# Altium PCB TH255A_MG32F003_TSSOP20_QFN20_EV_V10.PcbDoc (part 2 of 2)
Units mil, origin at the board's own origin, x right, y up, seen from the top; angles counter-clockwise.
Board outline 4094.49 x 2637.8 mil, 2 copper layers (Top Layer, Bottom Layer); 121 components, 89 nets, 513 pads, 230 vias.
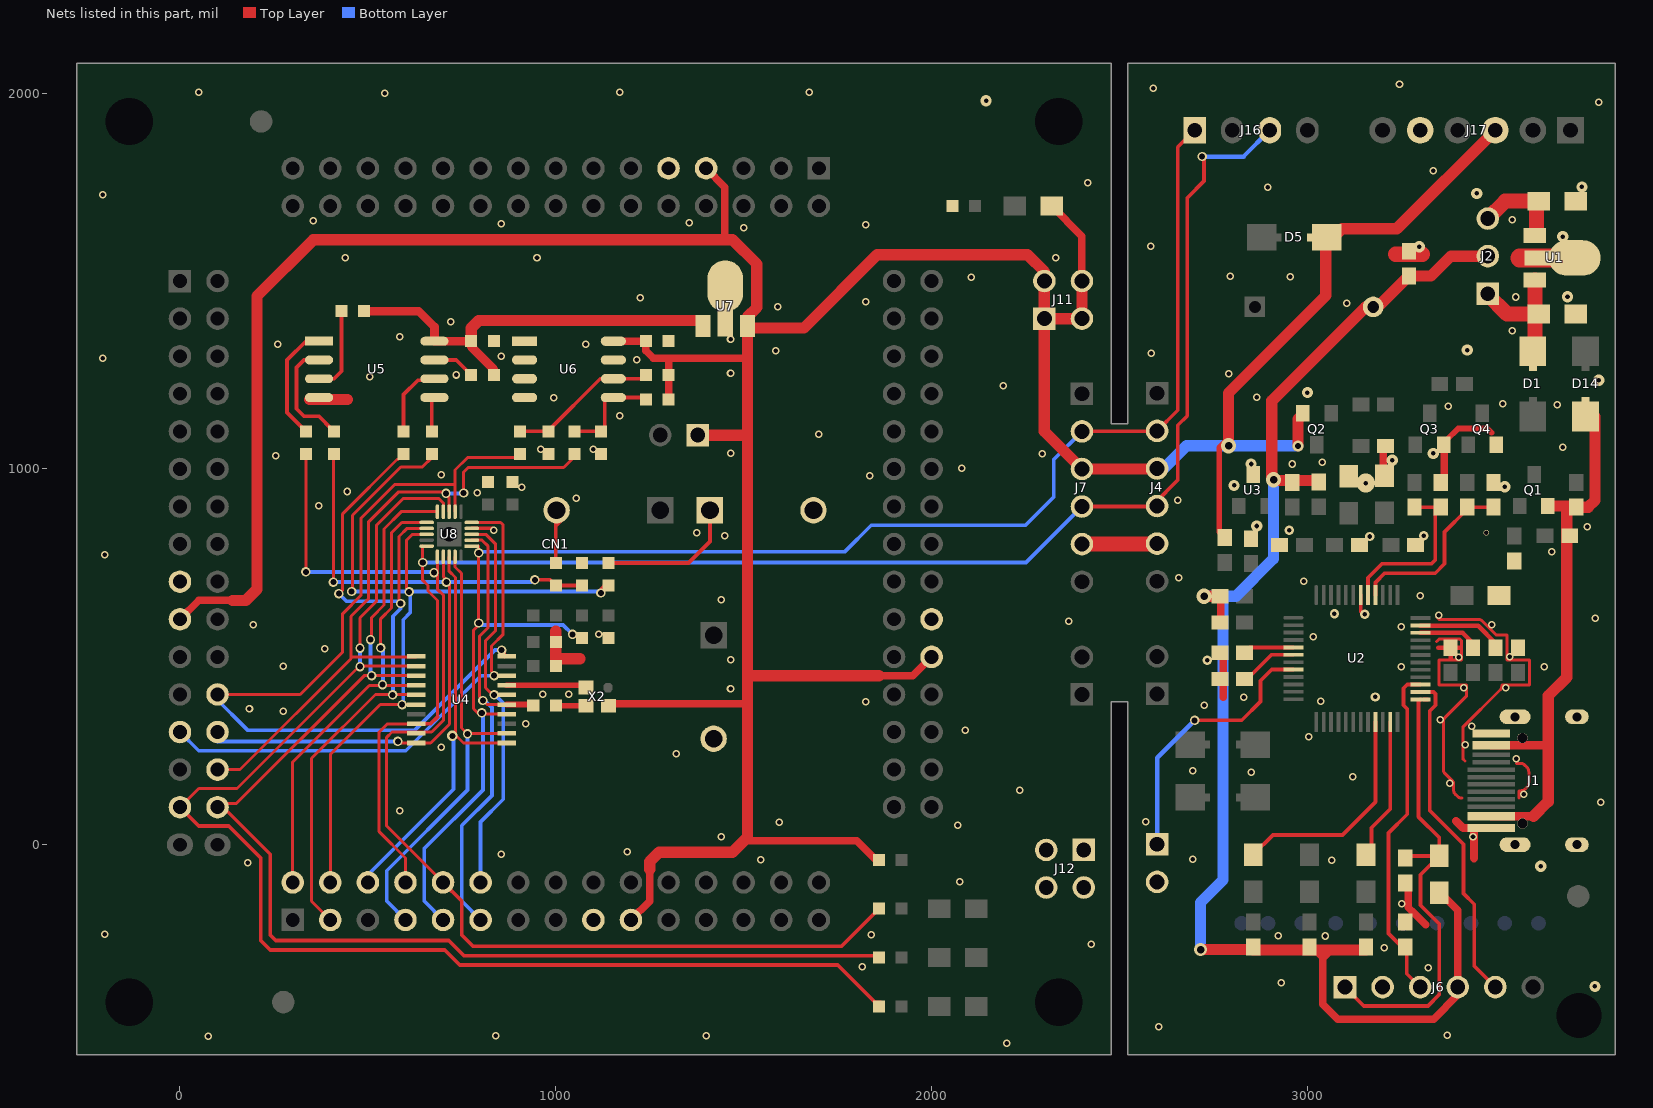
[diagram p2: the nets of this part, all layers, seen from the top]

## Via types
v1: diameter 20, hole 12, Top Layer to Bottom Layer, tented top, 135 vias
v2: diameter 25, hole 16, Top Layer to Bottom Layer, tented top, 45 vias
v3: diameter 30, hole 12, Top Layer to Bottom Layer, tented top, 17 vias
v4: diameter 20, hole 12, Top Layer to Bottom Layer, tented both sides, 15 vias
v5: diameter 25, hole 12, Top Layer to Bottom Layer, tented top, 7 vias
v6: diameter 30, hole 16, Top Layer to Bottom Layer, tented top, 3 vias
v7: diameter 40, hole 20, Top Layer to Bottom Layer, tented top, 3 vias
v8: diameter 28, hole 16, Top Layer to Bottom Layer, tented top, 1 vias
v9: diameter 15, hole 12, Top Layer to Bottom Layer, tented top, 1 vias
v10: diameter 35, hole 20, Top Layer to Bottom Layer, tented top, 1 vias
v11: diameter 50, hole 12, Top Layer to Bottom Layer, tented top, 1 vias
v12: diameter 25, hole 16, Top Layer to Bottom Layer, tented both sides, 1 vias

## Nets (pads, with @x,y where several pads share a name; then routed paths per layer and width w, separated by ;. In a path a pad name is that pad's centre, name@x,y a point inside that pad or via, vN(x,y) a via of type N, cw(c..) or ccw(c..) an arc to the next point about the centre after c; other vN are vias at no path point) (continued)
NetR15_1: R15.1 U2.35 | length 263.6
  Top Layer w12: U2.35@3300.46,582.73 3330,582.73 ; 3362.26,582.73 3330,582.73 ; R15.1@3500.55,524.26 3500.55,536.26 3454.08,582.73 3330,582.73
NetR16_1: R16.1 U2.34 | length 163.6
  Top Layer w12: U2.34@3300.46,564.05 3412.76,564.05 3440.55,536.26 R16.1@3440.55,524.26
NetR59_1: R59.1 U5.7 | length 114.5
  Top Layer w10: U5.7@677.09,1290 735,1290 R59.1@775,1250
NetR60_2: R60.2 U5.3 | length 218.2
  Top Layer w10: U5.3@370,1240 409.87,1240 430,1260.13 R60.2@430,1410
NetR70_1: R70.1 SW4.2 | length 169.2
  Top Layer w10: R70.1@1000,750 1000,847.79 ; SW4.2@1000,887.79 1000,847.79 ; SW4.2@1022.2,870 1000,847.79
NetR72_2: R72.2 SW3.1 | length 376.6
  Top Layer w10: R72.2@1140,750 1353,750 1410,807 SW3.1@1410,890
P44: J6.5 U2.26 | length 900.8
  Top Layer w10: U2.26@3300.46,406.57 3335.24,406.57 3340.55,401.26 3340.55,371.26 3325.55,356.26 3325.55,91.26 3415.55,1.26 3415.55,-129.74 3444.1,-158.29 3444.1,-322.84 J6.5@3500,-378.74
P45: J6.3 R25.1 U2.27 | length 924.9
  Top Layer w10: R25.1@3264.28,-268.02 3264.28,-271.74 3264.28,-343.02 J6.3@3300,-378.74 ; R25.1@3265.55,-266.74 3260.55,-266.74 3245.99,-266.74 3215.55,-236.3 3215.55,31.26 3265.55,81.26 3265.55,361.26 3255.55,371.26 3255.55,416.26 3265.54,426.25 U2.27@3300.46,426.25 ; J6.3@3301.28,-377.46 J6.3@3308.55,-384.74
PA0: CN1.114 R61.1 U4.10 U8.7 | length 2264.6
  Top Layer w8: CN1.114@100,400 320,400 433,513 433,615 482.31,664.31 482.31,869.77 570.57,958.03 732.12,958.03 ; U8.7@732.12,886.22 732.12,958.03 ; U4.10@860.89,500.49 U4.10@863,500.49 ; U4.10@863,500.2 U4.10@863,500.49 ; v2@863,517 863,501.2 U4.10@863,500.49 ; U4.10@869,501.2 868.29,500.49 U4.10@863,500.49 ; R61.1@905,1030 765,1030 732.12,997.12 732.12,958.03
  Bottom Layer w10: CN1.114@85,400 92.5,392.5 180,305 625,305 838,518 v2(856,518)
PA0_I2C1_SCL: C46.1 R61.2 R68.2 U6.6 | length 381.4
  Top Layer w10: R61.2@905,1100 978.37,1100 979.18,1100.82 1118.37,1240 U6.6@1153.11,1240 R68.2@1228.37,1240
PA1: CN1.115 U4.8 U8.5 | length 1428.8
  Top Layer w8: U8.5@776.37,857.72 853.35,857.72 860,851.06 860,560 829,529 829,461
  Bottom Layer w10: CN1.115@0,300 50,250 601,250 801,450 v2(836,450)
PA2: CN1.116 R63.1 R70.2 R71.1 U4.20 U8.17 | length 2073.4
  Top Layer w8: v2@409,703 R63.1@409,1040 ; v2@589.2,270.8 U4.20@628.84,270.8 667,270.8 717,320.8 v2@717,697 ; U8.17@700.63,766.22 700.63,713.37 v2@712,702
  Top Layer w10: v2(944.41,705) 985,705 R70.2@1000,690 R71.1@1070,690
  Bottom Layer w10: CN1.116@100,275 v2(580,275) v2@585,275 ; v2(408,699) v2(709,699) v2@934,699
PA2_SPI_MISO: R63.2 U5.2 | length 296
  Top Layer w10: U5.2@370,1290 330,1290 310,1270 310,1160 330,1140 369.9,1140 R63.2@404.9,1105
PA4: CN1.118 R62.1 U4.11 U8.8 | length 1739.4
  Top Layer w8: CN1.118@100,200 160,200 455,495 455,499 ; U4.11@628.84,501.2 626.64,499 455,499 ; U8.8@716.37,886.22 716.37,923.63 706.5,933.5 701.97,938.03 580.57,938.03 502.31,859.77 502.31,655.31 455,608 455,499 ; v2(755,936) 755,992 767,1004 1021,1004 R62.1@1049.5,1032.5
  Bottom Layer w10: v2(708,935) v2@754,935
PA4_I2C1_SDA: C45.1 R57.2 R62.2 U6.5 | length 245.9
  Top Layer w10: R62.2@1050,1100 C45.1@1120,1100 ; C45.1@1130,1100 1130,1190 U6.5@1130,1194 ; U6.5@1153.11,1190 R57.2@1235,1190
PA5: CN1.119 R56.1 U4.12 U8.9 | length 3625.2
  Top Layer w8: CN1.119@0,100 50,150 152,150 473.5,471.5 473.5,474 473.5,476.5 v2@474,477 ; v2@474,475.6 479,475.6 U4.12@628.84,475.6 ; v2@474,523 476.5,525.5 479,528 479,604 522.93,647.93 522.93,850.4 593.48,920.94 689.06,920.94 700.63,909.37 U8.9@700.63,886.22
  Top Layer w10: CN1.119@0,100 50,50 130,50 215,-35 215,-255 240,-280 704.64,-280 744.64,-320 1750,-320 1848.74,-418.74 1860,-418.74 R56.1@1864.96,-418.74
  Bottom Layer w10: v2@479,477 v2(479,523)
  other v2: 479,474
PA6: CN1.120 R55.1 U4.13 U8.10 | length 3259.2
  Top Layer w8: CN1.120@100,100 115,100 125,110 150,110 490,450 v2(510,450) U4.13@628.84,450 ; v2@510,546 510,605 542.93,637.93 542.93,840.4 588.76,886.22 U8.10@684.88,886.22
  Top Layer w10: CN1.120@115,100 240,-25 240,-240 255,-255 715,-255 755,-295 1843.7,-295
  Bottom Layer w10: v2@507,450 v2(507,546) ; v2@508.5,547.5 v2@510,546
PA7: CN1.2 U4.14 U8.11 | length 1287.9
  Top Layer w8: CN1.2@300,-100 300,-50 ; 300,-20 300,-50 ; v2(534,524) 534,601.07 562.93,630 562.93,830.4 590.25,857.72 U8.11@656.37,857.72 ; U4.14@628.84,424.4 539,424.4 538.91,424.4 538.16,425.16 536.16,427.16 533,424 504,424 300,220 300,-50
  Bottom Layer w10: v2@540,425 540,426 v2@540,524
  other v2: 539,426
PA8: CN1.3 R65.1 U4.15 U8.12 | length 1975.2
  Top Layer w8: CN1.3@400,-200 350,-150 350,230 520,400 ; v2(423,668) 433,678 433,880.46 577.54,1025 580,1025 R65.1@595,1040 ; v2@582.93,647 582.93,820.4 604.51,841.97 U8.12@656.37,841.97 ; U4.15@630,400 628.84,400 v2@566,400 ; 520,400 v2@566,400 ; 520,400 v2@566,400
  Bottom Layer w10: v2(423,668) 443,648 v2@587,648 ; v2@567,400 567,608 587,628 v2(587,642) v2@587,647
  other v2: 566,399
PA8_SPI_SCK: R65.2 U5.6 | length 217.2
  Top Layer w10: R65.2@595,1100 595,1197.78 633.48,1236.26 677.09,1236.26 U5.6@698.5,1236.26
PA9: CN1.4 R64.1 R72.1 U4.16 U8.13 | length 2287.5
  Top Layer w8: CN1.4@400,-100 400,240 533.2,373.2 591,373.2 U4.16@628.84,373.2 ; v2@459.31,674 459.31,876.77 587.54,1005 645,1005 670,1030 R64.1@670,1040 ; v2@602.31,681.69 602.31,809.77 618.76,826.22 U8.13@656.37,826.22
  Top Layer w10: v2(1120,670) 1120,680 R72.1@1135,695
  Bottom Layer w10: v2@459.31,674 610,674 v2@1120,674 ; v2@594,382.2 594,599 613,618 v2@613,670
  other v2: 591,373 610,673 457,674
PA9_SPI_MOSI: R64.2 U5.5 | length 90
  Top Layer w10: R64.2@670,1100 U5.5@670,1190
PA11: CN1.6 U4.1 U8.18 | length 1107.6
  Top Layer w8: U8.18@716.37,766.22 716.37,727.63 733,711 733,292 754.2,270.8 U4.1@869,270.8
  Bottom Layer w10: CN1.6@500,-100 500,-80 727.5,147.5 v8@727.5,287.5
  other v8: 725,290
PA12: CN1.7 U4.2 U8.19 | length 1193
  Top Layer w8: U8.19@732.12,766.22 732.12,739 749,722.12 749,311 763.6,296.4 765,296.4 U4.2@869,296.4
  Bottom Layer w10: CN1.7@600,-200 550,-150 550,-69.08 765,145.92 v2(765,295)
PA13_SWDIO: CN1.8 J4.4 J7.4 J16.3 U4.18 U8.15 | length 4460.5
  Top Layer w8: CN1.8@600,-100 600,-35 530,35 530,300 552,322 U4.18@628.84,322 ; U8.15@645,795 645,794.72 645,751 645,705 660,690 660,675 685,650 685,340
  Top Layer w10: U4.18@628.84,322 667,322 685,340 ; J7.4@2400,900 J4.4@2585,900 ; J4.4@2593,908.26 2655,970.26 2655,1116.26 2680,1141.26 2680,1721.26 2725,1766.26 v12@2725,1831.26
  Bottom Layer w10: v2@645,751 v2(646,751) 1405,751 ; 1605,751 1405,751 ; J7.4@2400,900 2251,751 1405,751
  Bottom Layer w12: v12(2720,1831.26) 2830,1831.26 J16.3@2900,1901.26
PA14_SWCLK: CN1.9 J4.2 J7.2 J16.1 R69.1 U4.4 U8.1 | length 4290.9
  Top Layer w8: U8.1@795,795 795,794.72 v2(795,777) v2(795,590) 795,585 781,571 781,362 v2@795.4,347.6 ; v2@803,347.6 U4.4@869,347.6
  Top Layer w10: v2@1040,555 R69.1@1070,555 ; J7.2@2400,1100 J4.2@2600,1100 ; J4.2@2600,1101.26 2655,1156.26 2655,1856.26 J16.1@2700,1901.26
  Bottom Layer w10: CN1.9@700,-200 650,-150 650,-10 806,146 v2@806,351 ; v2@795,585 1019.41,585 v2(1044.41,560) ; v2@795,775 800,780 1769.64,780 1839.64,850 2250,850 2325,925 2325,1025 J7.2@2400,1100
  other v2: 803,351
PA15: CN1.10 R54.1 R66.1 U4.19 U8.16 | length 3029.1
  Top Layer w8: v2@335,736 R66.1@335,1040 ; U8.16@684.88,766.22 684.88,724 684.88,680.12 701,664 701,331.2 669.8,300 628.84,300 564,300 550,286 550,50 CN1.10@700,-100
  Top Layer w10: CN1.10@700,-100 750,-150 750,-240 780,-270 1760,-270 R54.1@1860,-170
  Bottom Layer w10: v2(335,726) v2@676,726
  other v2: 676,724
PA15_SPI_NSS: R66.2 U5.1 | length 316.4
  Top Layer w10: R66.2@335,1100 285,1150 285,1290 335,1340 U5.1@370,1340
PASS: D3.2 U2.23 | length 376.3
  Top Layer w10: D3.2@3170.55,-28.74 3170.55,-26.27 3170.55,45.42 3220.3,95.18 U2.23@3220.3,326.91
PB0: CN1.11 R67.1 U4.5 U8.2 | length 1262.9
  Top Layer w8: U8.2@776.37,810.47 803.53,810.47 820,794 820,578 797,555 797,393 v2(806,384) 816.8,373.2 U4.5@869,373.2
  Top Layer w15: U4.5@869,373.2 R67.1@940,373.2
  Bottom Layer w10: CN1.11@800,-200 750,-150 750,50.92 830,130.92 830,365 811,384 v2(806,384)
PB0_OSCIN: R67.2 X2.3 | length 80
  Top Layer w15: R67.2@1000,370 X2.3@1080,370
PB1: CN1.12 U4.6 U8.3 | length 1065.9
  Top Layer w8: U8.3@776.37,826.22 813.78,826.22 840,800 840,570 813,543 813,418 832.2,398.8 v2(836,398.8) U4.6@869,398.8
  Bottom Layer w10: CN1.12@800,-100 800,61 860,121 860,377 v2@837.1,399.9
RST: C12.2 J6.1 R22.2 U2.25 | length 1228.1
  Top Layer w10: J6.1@3100,-378.74 3150,-428.74 3320.55,-428.74 3350.55,-398.74 3350.55,-210.74 3300.55,-160.74 3300.55,-79.53 C12.2@3350.55,-29.53 ; R22.2@3266.76,-29.53 C12.2@3350.55,-29.53 ; U2.25@3300.55,386.26 3295.55,381.26 3295.55,74.26 3350.55,19.26 C12.2@3350.55,-29.53 ; U2.25@3310,386.88 U2.25@3319.38,386.88
RST_CTRL_51: R19.1 R20.1 U2.41 | length 455
  Top Layer w10: U2.41@3161.25,664.39 3161.25,710.38 3198.38,747.52 3329.96,747.52 3340,757.56 R20.1@3340,898.26 ; R19.1@3285,898.26 R20.1@3340,898.26 ; R20.1@3355,898.26 R20.1@3340,898.26
RST_CTRL_ARM: R23.1 R24.1 U2.40 | length 474.6
  Top Layer w10: U2.40@3180.93,664.39 3180.93,698.19 3205.26,722.52 3339.96,722.52 3365,747.56 3365,832.56 R23.1@3422.46,890.02 ; R23.1@3425,898.26 R24.1@3495,898.26
TOOL_OPTION0: R2.1 U2.5 | length 135.2
  Top Layer w10: R2.1@2833,511.26 2846.92,525.18 U2.5@2962.48,525.18
TOOL_OPTION1: R3.1 U2.6 | length 156.1
  Top Layer w10: R3.1@2833,441.26 2840,441.26 2904.23,505.49 U2.6@2962.48,505.49
USBOK: D2.2 U2.21 | length 596.3
  Top Layer w10: D2.2@2855.55,-26.27 2908.08,26.26 3093,26.26 3180.93,114.2 U2.21@3180.93,326.91
VCC3: C47.1 R59.2 R60.1 U5.8 U7.1 | length 1115.4
  Top Layer w23: R60.1@490,1420 635,1420 677.09,1377.91 U5.8@677.09,1340 C47.1@775,1340 775,1325 835,1265 R59.2@835,1250
  Top Layer w30: C47.1@775,1340 775,1375 795,1395 U7.1@1391.89,1395
VCC_USB: C2.1 D14.1 J1.A4 J1.A9 J1.M5 J1.M6 Q1.2 R1.1 | length 1456.2
  Top Layer w22: J1.A4@3488.8,75.87 3572.2,75.87 3601.63,75.87 ; J1.A9@3488.8,264.88 3572.2,264.88 3640.55,264.88
  Top Layer w30: 3601.63,75.87 3640.55,114.8 3640.55,264.88 3640.55,396.26 3689.88,445.59 3689.88,822.52 3689.88,888.14 ; Q1.2@3640,901.26 3692,901.26 ; R1.1@3705,898.26 R1.1@3715,898.26 3746.96,898.26 3764.96,916.26 D14.1@3764.96,1139.65
VCP_OPTION: J3.1 U2.8 | length 722
  Top Layer w10: v2(2699.96,331.26) 2825,331.26 2875,381.26 2875,436.26 2904.86,466.12 U2.8@2962.48,466.12
  Bottom Layer w12: J3.1@2600,1.26 2600,231.3 v2(2699.96,331.26)
VDD: C12.1 J2.2 J6.4 R4.1 R6.1 R9.1 R10.1 R11.1 R12.1 R13.1 R14.2 SW1.2 | length 3958.9
  Top Layer w12: R11.1@3014.74,-279.22 3015.26,-279.74 3040.55,-305.03 3040.9,-305.38 ; 3040.91,-307.09 3067.07,-280.93
  Top Layer w20: v7@2728.07,656.26 R13.1@2762,656.26 ; v7@2733.07,666.26 R13.1@2767,666.26 ; R12.1@2769,591.26 R13.1@2769,660.82 ; 3040.55,-279.74 3040.55,-305.03 3040.55,-423.74 3080.55,-463.74 3335.55,-463.74 3400,-399.29 J6.4@3400,-378.74 3400,-174.19 3360.55,-134.74 C12.1@3360.55,-127.95
  Top Layer w30: v10(2715.55,-278.74) R6.1@2855.55,-278.74 ; R6.1@2855.55,-279.74 3005.55,-279.74 3015.26,-279.74 3040.55,-279.74 R9.1@3155.55,-279.74 ; R14.2@2964.96,969.26 2959.96,969.26 2911.96,969.26 v7(2909.96,971.26) 2904.96,976.26 2904.96,1181.26 3153.71,1430.01 3163.79,1430.01 3168.77,1425.03 3175,1418.8 3181.23,1425.03 3269.46,1513.26 R4.1@3270,1513.26 3328.96,1513.26 3381.96,1566.26 J2.2@3480,1566.26 ; R14.2@2969.96,969.26 R10.1@3029.96,969.26
  Bottom Layer w30: v10(2715.55,-278.74) 2715.55,-153.74 2775.55,-93.74 2775.55,661.26 ; v7(2725,661.26) 2775.55,661.26 ; 2775.55,661.36 2775.55,661.26 ; v7(2909.96,971.26) 2909.96,761.22 2810,661.26 2775.55,661.26
VDD3: C5.1 J2.3 U1.1 | length 231.2
  Top Layer w40: J2.3@3480,1666.26 3526.26,1712.52 C5.1@3609.96,1712.52 ; U1.1@3609.96,1636.26 C5.1@3609.96,1712.52 ; C5.1@3615.75,1712.52 C5.1@3609.96,1712.52
VDD5: C4.1 D1.2 J2.1 U1.3 | length 318.5
  Top Layer w40: J2.1@3478.52,1464.78 3530.79,1412.52 C4.1@3604.96,1412.52 ; D1.2@3604.96,1342.87 C4.1@3604.96,1412.52 ; U1.3@3604.96,1502.52 C4.1@3604.96,1412.52 ; C4.1@3615.75,1412.52 C4.1@3604.96,1412.52
VDUT: C44.1 CN1.19 CN1.39 CN1.67 CN1.109 D5.2 D13.1 J4.3 J7.3 J11.1 J11.2 J11.3 J11.4 J17.3 JP3.1 Q2.2 R7.1 R57.1 R58.2 R68.1 U6.8 U7.3 X2.4 | length 10608.6
  Top Layer w15: R7.1@2780,817.26 2765,832.26 2765,1056.76 2780,1071.76 2790,1081.76 ; v7@2797.75,1054.01 v7@2800,1056.26
  Top Layer w20: CN1.109@0,600 50,650 140,650 ; X2.4@1140,375 1510,375 ; U6.8@1153.11,1340 C44.1@1240,1340 1240,1315 1260,1295 1510,1295 ; CN1.19@1200,-200 1250,-150 1250,-65 ; R57.1@1300,1185 R68.1@1300,1250 1300,1295 ; CN1.67@1400,1800 1450,1750 1450,1610 ; 1511.26,11.26 1800.6,11.26 R58.2@1855.93,-44.07 ; 1860,450 1950,450 CN1.39@2000,500 ; D13.1@2319.21,1700 2400,1619.21 J11.4@2400,1500 ; D5.2@3018.11,1616.26 D5.2@3051.58,1616.26 D5.2@3069.09,1616.26
  Top Layer w30: 140,650 175,650 205,680 205,1460 355,1610 1450,1610 1470,1610 1535,1545 1535,1430 1510,1405 U7.3@1510,1390 ; 1250,-65 1250,-45 1275,-20 1470,-20 1510,20 1510,375 1510,450 ; 1410,1090 1510,1090 ; 1860,450 1510,450 ; J11.4@2400,1500 J11.3@2400,1400 J11.1@2300,1400 ; J4.3@2600,1000 J7.3@2400,1000 2300,1100 J11.1@2300,1400 ; v7(2790,1061.76) 2790,1081.76 2790,1202.17 3049.09,1461.26 D5.2@3049.09,1611.26 ; v6@2974.96,1061.76 2974.96,1132.2 Q2.2@2987.96,1145.2 ; D5.2@3064.09,1611.26 3069.09,1616.26 3091.85,1639.02 3237.76,1639.02 J17.3@3500,1901.26 ; 1510,450 1510,1090 ; 1510,1090 1510,1295 U7.3@1510,1380 U7.3@1510,1390 ; U7.3@1510,1390 1515,1385 1525,1375 1660,1375 1855,1570 2255,1570 2300,1525 J11.2@2300,1500 J11.1@2300,1400
  Bottom Layer w30: J4.3@2618.03,1001.76 2678.03,1061.76 v7(2790,1061.76) v6@2974.96,1061.76
  other v6: 2974.96,1061.26
VSS: C1.2 C3.2 C4.2 C5.2 C6.2 C7.1 C8.1 C9.2 C10.2 C11.2 C13.2 C14.2 C15.2 C16.2 C18.1 C44.2 C45.2 C46.2 C47.2 CN1.17 CN1.41 CN1.69 CN1.107 J1.A1 J1.A12 J1.M1 J1.M2 J1.M3 J1.M4 J3.2 J4.5 J6.2 J7.5 J12.1 J12.2 J12.3 J12.4 J17.5 Q3.3 Q4.3 R2.2 R3.2 R4.2 R5.1 R8.2 R20.2 R21.2 R22.1 R24.2 R25.2 R43.1 R71.2 SW2.2 SW3.2 U1.2 U2.42 U3.3 U4.7 U5.4 U6.1 U6.2 U6.3 U6.4 U6.7 U7.2 U8.4 X2.2 | length 3566.8
  Top Layer w8: 3344.04,541.05 3350.04,547.05 3380.55,547.05 3405.72,547.05 3410.55,542.22 3410.55,499.26 3410.55,491.76 3402.55,491.76 3350.55,491.76 3350.55,424.76 3415.55,424.76 3423.55,424.76 3423.55,418.26 3423.55,396.3 3366.53,339.28 ; v1@3344.55,605.26 3350.08,599.73 3454.08,599.73 ; 3366.53,188.78 cw(c3378.55,200.8) 3361.55,200.8 ; 3366.55,339.26 ccw(c3378.57,327.24) 3361.57,327.24 3361.55,200.8 ; 3399.17,128.83 ccw(c3411.19,140.85) 3411.19,123.85 cw(c3411.19,140.85) 3399.15,128.85 3393.55,134.45 ; 3419.55,222.9 3413.55,228.9 3413.55,266.26 3413.55,312.76 3512.55,411.76 ccw(c3500.55,423.8) 3517.55,423.8 cw(c3500.55,423.8) 3512.57,411.78 ; 3517.55,424.76 3527.55,424.76 3590.55,424.76 3590.55,491.76 3538.55,491.76 3530.55,491.76 3530.55,500.26 3530.55,557.76 3503.09,557.76 3483.07,577.78 3466.12,594.73 ; 3556.09,216.9 3566.41,216.9 ; 3562.8,123.94 3562.8,134.26 3562.8,143.53 3567.33,143.53 ; 3579.35,148.51 cw(c3567.33,160.53) 3567.33,143.53 ; 3584.08,153.24 ccw(c3572.06,165.26) 3589.06,165.26 ; 3584.08,206.28 cw(c3572.06,194.26) 3589.06,194.26 ; 3361.55,200.8 ccw(c3378.55,200.8) 3366.55,188.76 3385.3,170.01 3388.55,166.76 3388.55,163.26 3388.55,146.49 ; 3388.55,146.49 ccw(c3405.55,146.49) 3393.55,134.45 ; 3388.55,146.49 ccw(c3405.55,146.49) 3393.53,134.47 ; 3454.08,599.73 cw(c3454.08,582.73) 3466.12,594.73 ; 3454.08,599.73 cw(c3454.08,582.73) 3466.1,594.75 ; 3566.41,216.9 cw(c3566.41,199.9) 3578.43,211.92 ; 3566.41,216.9 cw(c3566.41,199.9) 3578.45,211.9 ; 3567.33,143.53 ccw(c3567.33,160.53) 3579.37,148.53 3584.06,153.22 ccw(c3572.06,165.26) 3589.06,165.26 ; 3578.45,211.9 3584.06,206.3 cw(c3572.06,194.26) 3589.06,194.26 ; 3589.06,165.26 3589.06,194.26
  Top Layer w10: U8.4@776.37,841.97 830.03,841.97 v1(835,837) ; 3141.56,620.27 U2.42@3141.56,664.39
  Top Layer w12: 3348.55,524.26 C1.2@3380.55,524.26 C1.2@3381.55,524.26 ; 3381.55,495.26 C1.2@3381.55,524.26 ; C1.2@3381.55,532.26 C1.2@3381.55,524.26 ; 3408.55,524.26 C1.2@3381.55,524.26
  Top Layer w15: 940,424.4 U4.7@869,424.4 X2.2@1075,424.4 ; Q3.3@3370.25,1076.55 3401.2,1107.5 3478.66,1107.5 3489.9,1096.26
  Top Layer w20: 2776,393.16 2776,441.26 R2.2@2776,508.79 ; C9.2@3202,969.26 3202,981.73 3202,1023.26 3202,1061.26 R21.2@3202,1066.79 ; R22.1@3268.55,-97.74 3268.55,-101.74 3268.55,-156.84 3268.55,-166.85 3283.99,-182.3 3315.04,-213.34 ; R20.2@3364,956.26 3364,964.26 Q3.3@3364,1053.79
  Top Layer w22: 3395.55,63.16 3414.34,44.38 J1.A1@3488.8,44.38 J1.A1@3540.55,44.38 ; 3443.44,-35.95 3443.44,21.26 J1.A1@3443.44,38.51
  Top Layer w30: U5.4@344.9,1185 370,1185 444.9,1185 ; 1000,495 1064.4,495 ; 1000,503.6 C14.2@1000,540 1000,568
  Top Layer w40: J7.5@2400,800 J4.5@2600,800 ; 3234.9,1571.26 3270,1571.26 3297.56,1571.26 3306,1571.26
  Top Layer w50: 3564.96,1561.57 U1.2@3628.58,1561.57 U1.2@3704.96,1561.57
  other v1: 2200,-528.1 74.9,-510 840,-508.1 1400,-508.1 3372.55,-506.84 2604.9,-483.74 2930.55,-366.84 3321.55,-326.84 1814.9,-325 3204.9,-273.74 2424.9,-265 3047.55,-242.74 2922.55,-241.74 1840,-240 -200,-238.1 3251.55,-156.84 180,-48.1 3064.9,-40.74 2694.9,-38.74 854.9,-25 1190,-18.1 3440.55,21.26 1440,21.9 2070,51.9 1594.9,60 2570,61.26 584.9,90 3780.55,113.16 3575.55,134.26 2234.9,145 3378.55,163.26 3120.55,181.26 2850,193.16 2694.9,197.26 3555.55,229.26 1320,241.9 694.9,260 3420.55,266.26 3003,287.26 2090,305 3437.55,315.26 920,321.9 3353.55,333.16 274.9,355 185,361.9 2724.9,371.26 1824.9,380 3034.9,381.26 2829.96,393.16 965,400 1035,400 3527.55,417.26 3415.55,418.26 3250,473.16 3630.55,473.16 274.9,475 3402.55,499.26 3538.55,500.26 385,521.9 3015,553.16 3249.55,580.26 194.9,585 3490.55,585.26 2364.9,595 3765.55,603.16 3349.55,611.26 3300,663.16 2990,701.26 2656.96,710.52 -200,771.9 3649.55,780.26 3744.9,846.26 369,902 2654.9,916.26 791,937 1835,981.9 2080,1001.9 2959.96,1013.16 3039.96,1017.52 254.9,1035 2294.9,1040 960,1051.9 1100,1051.9 3679.96,1057.52 1700,1091.9 3374.9,1166.26 3664.9,1171.26 3519.96,1173.16 994.9,1190 2864.9,1191.26 2190,1221.9 504.9,1245 734.9,1250 2790,1253.16 1214.9,1290 -205.1,1295 854.9,1300 2584.9,1307.26 1584.9,1315 260,1331.9 1080,1331.9 1464.9,1345 585,1351.9 3544.96,1367.52 720,1391.9 1590,1431.9 3104.9,1441.26 1824.9,1445 1224.9,1455 3554.9,1457.52 2104.9,1510 2954.9,1511.26 2795,1513.16 440,1561.9 950,1561.9 2330,1561.9 2582.55,1593.16 1500,1641.9 1824.9,1650 855,1651.9 1354.9,1655 354.9,1660 3544.96,1663.16 -205.1,1730 2894.9,1749.26 2415,1761.9 3335,1793.16 3774.9,1976.26 544.9,2000 50,2001.9 1170,2001.9 1675,2001.9 2589.96,2013.16 3244.96,2023.16
  other v3: 3765,-376.84 3620.55,-56.84 2864.96,848.19 3524.96,952.52 2804.9,956.26 2850,1013.16 3225.55,1023.26 3334.9,1041.26 2999.96,1203.16 3774.9,1236.26 3424.96,1316.26 3692,1458.16 3297.56,1591.26 3679.55,1618.26 3450.55,1733.16 3730.55,1750.26 2144.9,1980
  other v4: 2075,-98.1 1544.9,-40 1464.9,415 1465,491.9 1114.9,560 1440,651.9 1450,821.9 1374.9,830 1055,921.9 444.9,940 910,951.9 694.9,985 1465,1041.9 1170,1141.9 1464.9,1255
  other v5: 3180.55,393.26 2733.07,491.26 3152,613.26 3072,614.26 3165.55,820.26 3309.96,822.52 2951.55,837.26
  other v9: 3475.55,830.26
  other v11: 3154.96,962.52
pads on no net: CN1.1 CN1.13 CN1.14 CN1.15 CN1.16 CN1.18 CN1.20 CN1.21 CN1.22 CN1.23 CN1.24 CN1.25 CN1.26 CN1.27 CN1.28 CN1.29 CN1.30 CN1.31 CN1.32 CN1.33 CN1.34 CN1.35 CN1.36 CN1.37 CN1.38 CN1.40 CN1.42 CN1.43 CN1.44 CN1.45 CN1.46 CN1.47 CN1.48 CN1.49 CN1.50 CN1.51 CN1.52 CN1.53 CN1.54 CN1.55 CN1.56 CN1.57 CN1.58 CN1.59 CN1.60 CN1.61 CN1.62 CN1.63 CN1.64 CN1.65 CN1.66 CN1.68 CN1.70 CN1.71 CN1.72 CN1.73 CN1.74 CN1.75 CN1.76 CN1.77 CN1.78 CN1.79 CN1.80 CN1.81 CN1.82 CN1.83 CN1.84 CN1.85 CN1.86 CN1.87 CN1.88 CN1.89 CN1.90 CN1.91 CN1.92 CN1.93 CN1.94 CN1.95 CN1.96 CN1.97 CN1.98 CN1.99 CN1.100 CN1.101 CN1.102 CN1.103 CN1.104 CN1.105 CN1.106 CN1.108 CN1.110 CN1.111 CN1.112 CN1.113 CN1.121 CN1.122 J1.A5 J1.A8 J1.B5 J1.B8 J6.6 J7.1 U2.1 U2.2 U2.3 U2.4 U2.7 U2.24 U2.28 U2.29 U2.30 U2.32 U2.37 U2.38 U2.39 U2.46 U8.0 X2.1

## Polygon pours and split planes (outlines as drawn)
VSS on Top Layer "Top Layer-No Net" (hatched 90Degree grid 10 track 10, remove dead copper, pour order 1001): -250.04,-538.74 3794.96,-538.74 3794.96,2035 -250.04,2035
VSS on Bottom Layer "Top Layer-No Net" (hatched 90Degree grid 10 track 10, remove dead copper, pour order 1001): -250.04,-538.74 3794.96,-538.74 3794.96,2035 -250.04,2035

## Keep-outs
Top Layer:
  circle w5: c274.96,-418.74 r59.06
  circle w5: c215.96,1924.68 r59.06
  circle w5: c3720.55,-136.84 r59.06
Keep-Out Layer:
  circle w7.88: c-135.04,-418.74 r133.86
  circle w7.88: c2338.35,-418.74 r133.86
  circle w7.88: c2338.35,1924.68 r133.86
  circle w7.88: c-135.04,1924.68 r133.86
  lines w15: 2521.65,380 2478.35,380 2478.35,-558.74 -275.04,-558.74 -275.04,2079.06 2478.35,2079.06 2478.35,1120 2521.65,1120 ; 3819.45,-557.48 3819.45,2080.31

## Other copper
Top Layer:
  rectangle net VSS: 784.9,955 914.9,983.1
  pour cut-out: 2434.96,2065 2554.96,2065 2554.96,-558.74 2434.96,-558.74
Bottom Layer:
  pour cut-out: 2434.96,2066.26 2554.96,2066.26 2554.96,-558.74 2434.96,-558.74

## Silkscreen, mask and mechanical layers (free items; w line width, h text height)
Top Overlay:
  circle w10: c-135.04,1924.68 r137.8
  circle w10: c2338.35,1924.68 r137.8
  circle w4: c2338.35,-418.74 r137.8
  circle w10: c-135.04,-418.74 r137.8
  region: 2245.91,388.37 2292.82,362.72 2290.91,378.37 2340.91,378.37 2340.91,398.37 2290.91,398.37 2292.82,412.72
  region: 2339.36,500.55 2292.46,526.2 2294.36,510.55 2244.36,510.55 2244.36,490.55 2294.36,490.55 2292.46,476.2
  region: 2602.08,-294.69 2627.73,-222.79 2612.08,-224.69 2612.08,-164.69 2592.08,-164.69 2592.08,-224.69 2577.73,-222.79
  text "GND" at 1320,1865 h50 r90
  text "VDUT" at 1420,1865 h50 r90
  text "When J16 Open," at 2565,1776.26 h45
  text "SCL" at 3620,1761.26 h35 r90
  text "CLK" at 3720,1761.26 h35 r90
  text "RST" at 3220,1751.26 h37 r90
  text "GND" at 3320,1746.26 h37 r90
  text "SDA" at 3420,1746.26 h37 r90
  text "VCC" at 3520,1746.26 h37 r90
  text "SW1 must be off." at 2565,1701.26 h45
  text "VDD3" at 3289.96,1643.16 h37
  text "Power" at 2175,1600 h50
  text "VDD" at 3320,1546.26 h37
  text "VDD5" at 3289.96,1433.16 h37
  text "Power On" at 3100,1286.26 h45
  text "VDUT" at 2240,1281.9 h50
  text "Power Off" at 2670,1281.26 h45
  text "SCL" at 2255,1085 h33
  text "VDUT" at 2220,980 h33
  text "SDA" at 2250,885 h33
  text "GND" at 2250,780 h33
  text "Key1" at 1180,750 h50
  text "Key2" at 1510,735 h50
  text "RST" at 2255,680 h33
  text "GND" at -190,670 h50
  text "GND" at 2065,580 h50
  text "PA10_TX" at 2214.96,576.26 h38
  text "VDUT" at -230.04,571.9 h50
  text "↓" at 2720,501.26 h100 r90
  text "VDUT" at 2065,475 h50
  text "RESET" at 1525,450 h50
  text "↓" at 2670,401.26 h100 r270
  text "PA0" at 164.9,375 h50
  text "PA3_RX" at 2224.96,291.26 h38
  text "PA2" at 165,271.9 h50
  text "PA1" at -180,270 h50
  text "PA4" at 165,171.9 h50
  text "PA3" at -200,170 h50
  text "2024.06" at 1494.9,115 h35
  text "PA6" at 165,71.9 h50
  text "TH255A_MG32F003" at 1029.8,43.1 h50
  text "PA7" at 209.96,-28.74 h50
  text "TSSOP20_QFN20_EV_V10" at 1029.8,-31.9 h45
  text "PA9" at 420,-35 h50 r90
  text "PA11" at 520,-35 h50 r90
  text "PA13" at 620,-35 h50 r90
  text "PA15" at 720,-35 h50 r90
  text "PB1" at 825,-35 h50 r90
  text "GND" at 2269.96,-238.74 h50
  text "J3" at 2560,-356.84 h45
  text "PB0" at 825,-390 h50 r90
  text "GND" at 1130,-390 h50 r90
  text "PA8" at 420,-395 h50 r90
  text "Open Disable VCP." at 2540.55,-428.74 h40
  text "VDUT" at 1225,-434.29 h50 r90
  text "PA10" at 520,-435 h50 r90
  text "PA12" at 624.96,-438.74 h50 r90
  text "PA14" at 729.96,-438.74 h50 r90
  text "Short Enable VCP." at 2540.55,-523.74 h40
Mechanical 1:
  circle w7.88: c2500,450 r33
  circle w7.88: c2500,740 r25
  circle w7.88: c2500,858 r25
  circle w7.88: c2500,945 r27
  circle w7.88: c2500,1055 r27
  lines w7.88: 2478.35,520 2521.65,520 2521.65,674 2478.35,674 2478.35,520
  lines w8.88: -275.04,-558.74 2478.35,-558.74 2478.35,380 2521.65,380 2521.65,-558.74 3819.45,-558.74 3819.45,2079.06 2521.65,2079.06 2521.65,1120 2478.35,1120 2478.35,2079.06 -275.04,2079.06 -275.04,-558.74
Mechanical 2:
  lines w6: 2500,473 2500,450 2523,450 ; 2500,763 2500,740 2523,740 ; 2500,883 2500,860 2523,860 ; 2500,968 2500,945 2523,945 ; 2500,1078 2500,1055 2523,1055

## Dimensions
-275.04,-558.74 to 3819.45,-558.74 on Top Overlay
-275.04,-558.74 to -275.04,2079.06 on Top Overlay

## Text inside footprints (layer, text, board x,y; h text height)
J1: Mechanical 13 "AUC03-0116-141-S-A" at 3786.24,30.38 h15.75 r90; Mechanical 13 "pcb" at 3809.04,146.69 h15.75 r90; Mechanical 13 "2021-09-14" at 3845.04,95.69 h15.75 r90; Mechanical 13 "Champyang" at 3755.24,109.38 h15.75 r90
MW1: Top Overlay "make you win" at 1057.1,114.1 h50; Top Overlay "megawin" at 1058.1,180.1 h125
SW1: Top Overlay "1" at 2909.25,1409.21 h39.37; Top Overlay "ON" at 3084.45,1467.87 h39.37
X2: Mechanical 3 "V" at 1193,378.19 h20 r180; Mechanical 3 "O" at 1042,381.19 h20 r180; Mechanical 3 "G" at 1042,427.19 h20 r180